# Allegro board XR808ST0_REF1_SIMPLE_V1_0-20191017.brd
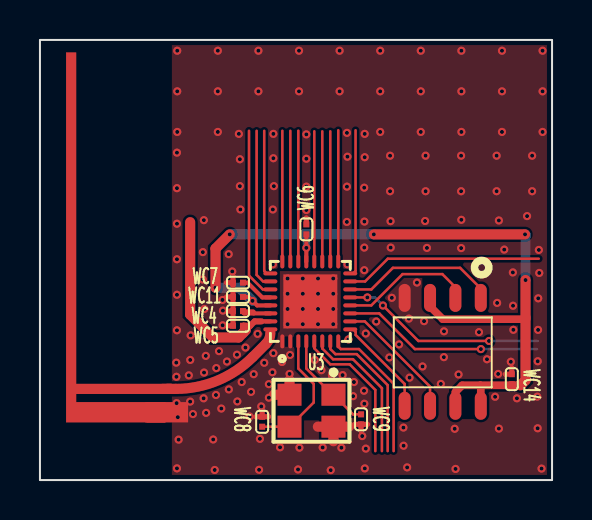
[diagram p0: board, top side]
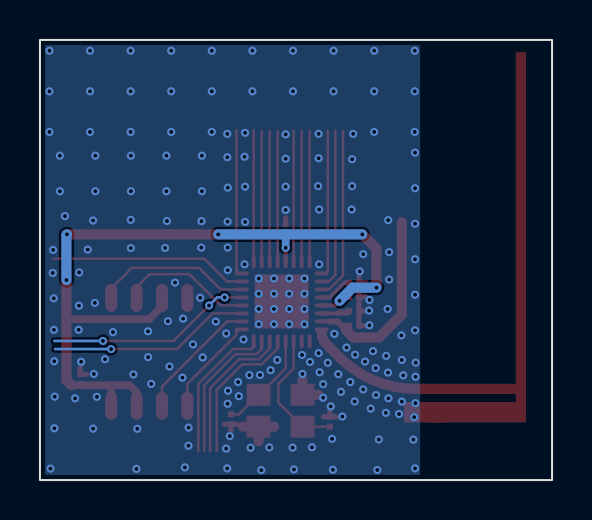
[diagram p1: board, bottom side, seen from below]

Outline 25.63 x 22.02 mm; copper layers: TOP, BOTTOM. Coordinates in mm from the lower left corner of the outline.
Outline path: rectangle 0,0 25.63,22.02

## Placement (name value [footprint] x y rotation side)
JW1  ANT-F  [ANT2B18_54X5_30]  6.35 4.56 90 top
U2  XR808ST  [QFN32P0_4B4_00X4_00H0_75]  13.53 8.94 90 top
U3  40MHz-E3SB40MHz  [CRY-TSX3225]  13.59 3.47 270 top
U4  SPI_NOR_16Mb  [SOP8_150MIL]  20.16 6.39 270 top
WC4  1uF  [C0201]  9.91 8.46 180 top
WC5  1uF  [C0201]  9.91 7.72 180 top
WC6  NC-104  [C0201]  13.34 12.55 90 top
WC7  1uF  [C0201]  9.91 9.88 0 top
WC8  10pF-NC  [C0201]  11.12 2.92 270 top
WC9  10pF-NC  [C0201]  16.07 3.04 270 top
WC11  1uF  [C0201]  9.91 9.16 180 top
WC14  NC-104  [C0201]  23.62 5.05 270 top

## Library data of the parts
JW1 = ANT-F_1
U2 = XR808ST0
U3 = Crystal4Pin_0
U4 = SPI-NOR-SO8
WC4-WC7 WC9 WC11 = CAPACITOR
WC8 WC14 = CAPACITOR_0

## Footprints (pads in the part's own frame, mm; a bottom-side part is the same pattern mirrored in y, then rotated)
ANT2B18_54X5_30
  rect 1.016x1.016 smd: 1(-1.168,0.577)
  rect 0.508x0.508 smd: 2(0,0)
C0201
  rect 0.3x0.3 smd: 1(-0.25,0) 2(0.25,0)
CRY-TSX3225
  rect 1.1x1.2 smd: 1(-0.8,1.1) 2(-0.8,-1.1) 3(0.8,-1.1) 4(0.8,1.1)
QFN32P0_4B4_00X4_00H0_75
  oval 0.7x0.2 smd: 1(-2,1.4) 2(-2,1) 3(-2,0.6) 4(-2,0.2) 5(-2,-0.2) 6(-2,-0.6) 7(-2,-1) 8(-2,-1.4) 17(2,-1.4) 18(2,-1) 19(2,-0.6) 20(2,-0.2) 21(2,0.2) 22(2,0.6) 23(2,1) 24(2,1.4)
  oval 0.2x0.7 smd: 9(-1.4,-2) 10(-1,-2) 11(-0.6,-2) 12(-0.2,-2) 13(0.2,-2) 14(0.6,-2) 15(1,-2) 16(1.4,-2) 25(1.4,2) 26(1,2) 27(0.6,2) 28(0.2,2) 29(-0.2,2) 30(-0.6,2) 31(-1,2) 32(-1.4,2)
  rect 2.7x2.7 smd: 33(0,0)
SOP8_150MIL
  oval 1.4x0.6 smd: 1(-2.725,1.905) 2(-2.725,0.635) 3(-2.725,-0.635) 4(-2.725,-1.905) 5(2.675,-1.905) 6(2.675,-0.635) 7(2.675,0.635) 8(2.675,1.905)

## Nets
GND: JW1.1(A) U2.1(GND1) U2.2(GND2) U2.33(EPAD) U3.2 U3.4(5) U4.4(VSS) WC4.2 WC5.2 WC6.2 WC7.1 WC8.1 WC9.2 WC11.2 WC14.1
VCC-BAT: U2.31(VBAT) WC5.1
VDD-ANA: U2.30(VDD_ANA) WC4.1
VDD-EXT: U2.21(VDD_IO) U2.29(VDD_EXT) U4.3(WP#) U4.7(HOLD#) U4.8(VCC) WC6.1 WC11.1 WC14.2
ANT: JW1.2(G) U2.32(ANT)
CHIP-PWD: U2.27(CHIP_PWD)
HXTAL1: U2.4(HXTAL1) U3.1 WC9.1
HXTAL2: U2.3(HXTAL2) U3.3 WC8.2
PA0: U2.7(PA00/TWI1_SCL/EINTA0)
PA1: U2.8(PA01/TWI1_SDA/EINTA1/PA18/TWI0_)
PA07: U2.20(PA07/UART1_TX/TWI0_SDA/EINTA7/P)
PA10: U2.23(PA10/ADC_CH0/PWM2/ECT2/EINTA10)
PA11: U2.22(PA11/ADC_CH1/PWM3/ECT3/EINTA11)
PA12: U2.26(LXTAL1/PA12/ADC_CH2/PWM4/ECT4/I)
PA13: U2.25(LXTAL2/PA13/ADC_CH3/PWM5/ECT5/U)
PA14: U2.24(PA14/ADC_CH4/PWM6/ECT6/UART1_RX)
PA19: U2.19(PA19/WUPIO5/UART2_RTS/TWI0_SCL/)
PA20: U2.18(PA20/WUPIO6/UART2_CTS/TWI0_SDA/)
PA21: U2.17(PA21/WUPIO7/UART2_RX/PWM2/ECT2/)
PA22: U2.16(PA22/WUPIO8/UART2_TX/PWM3/ECT3/)
PA23: U2.15(PA23/WUPIO9/TEST/EXT_DCDC_PUP/E)
PB2: U2.13(PB02/SWD_TMS/JTAG_TDO/PWM6/ECT6)
PB3: U2.11(PB03/SWD_TCK/JTAG_TDI/PWM7/ECT7)
SPI-CLK: U2.10(PB07/UART1_RTS/FLASH_CLK/EINTB7) U4.6(CLK)
SPI-CS: U2.14(PB06/UART1_CTS/FLASH_CS/EINTB6) U4.1(CS#)
SPI-MISO: U2.12(PB05/UART1_RX/FLASH_MISO/EINTB5) U4.2(MISO)
SPI-MOSI: U2.9(PB04/UART1_TX/FLASH_MOSI/EINTB4) U4.5(MOSI)
UART0-RX: U2.6(PB01/UART0_RX/JTAG_TCK/PWM5/ECT)
UART0-TX: U2.5(PB00/UART0_TX/JTAG_TMS/PWM4/ECT)
N17075984: U2.28(VDD_DIG) WC7.2

## Via types
v1: diameter 0.406, hole 0.203, TOP to BOTTOM, 210 vias

## Routing (per net, layer and track width the routed paths; a pad name or vN(x,y) marks a point on that pad's centre or on a via; arc(x,y) is an arc through that point)
GND: length 10.4
  TOP w0.254: 9.34,9.88 WC7.1 ; WC7.1 9.66,9.55 ; WC7.1 9.66,10.2 ; WC11.2 9.66,9.49 ; WC11.2 9.66,8.84 ; WC11.2 9.34,9.16 ; WC8.1 11.45,3.17 ; WC8.1 10.8,3.17 ; WC8.1 11.12,3.5 ; 9.66,8.05 WC5.2 9.34,7.72 ; WC4.2 9.66,8.78 ; WC4.2 9.66,8.13 ; WC4.2 9.34,8.46 ; 23.62,5.62 WC14.1 23.29,5.3 ; WC6.2 13.34,13.12 ; WC9.2 16.4,2.79 ; WC9.2 15.74,2.79 ; WC9.2 16.07,2.46
  TOP w0.508: U3.4 15.47,2.67 ; U3.4 13.91,2.67 ; U3.4 14.69,1.94 ; 11.71,4.27 U3.2 12.49,5
  vias: v1(6.82,5.87) v1(6.83,5.17) v1(6.84,3.85) v1(6.87,21.48) v1(6.87,19.45) v1(6.87,17.42) v1(6.86,16.38) v1(6.86,14.61) v1(6.86,12.83) v1(6.86,11.05) v1(6.86,9.27) v1(6.86,7.49) v1(6.9,3.15) v1(6.94,2.02) v1(6.86,0.58) v1(7.54,7.24) v1(7.52,6.01) v1(7.45,5.24) v1(7.52,3.92) v1(7.66,3.3) v1(8.2,13) v1(8.15,11.4) v1(8.15,10.03) v1(8.23,8.56) v1(8.21,5.38) v1(8.19,4.09) v1(8.3,6.21) v1(8.32,3.36) v1(8.67,2.03) v1(8.75,0.5) v1(8.83,5.6) v1(8.81,4.26) v1(8.9,21.48) v1(8.9,19.45) v1(8.9,17.42) v1(8.96,6.45) v1(9.14,9.01) v1(9.14,7.74) v1(9.08,3.58) v1(9.16,8.48) v1(9.45,11.3) v1(9.36,5.93) v1(9.45,4.53) v1(9.63,10.44) v1(9.86,6.27) v1(9.88,3.93) v1(9.96,17.32) v1(10.01,16.05) v1(10.01,14.71) v1(10.03,13.54) v1(10.1,4.9) v1(10.29,6.63) v1(10.5,3.18) v1(10.57,4.41) v1(10.7,5.3) v1(10.94,21.48) v1(10.94,19.45) v1(10.9,7.32) v1(11.01,2.06) v1(10.97,0.51) v1(11.08,3.68) v1(11.23,5.87) v1(11.46,4.8) v1(11.46,4.12) v1(11.64,5.39) v1(11.68,17.32) v1(11.68,16.1) v1(11.71,14.71) v1(11.66,13.54) v1(11.66,10.79) v1(11.68,6.35) v1(12.02,1.64) v1(12.12,5.91) v1(12.4,10.08) v1(12.4,9.32) v1(12.4,8.56) v1(12.4,7.8) v1(12.52,6.26) v1(12.49,5.31) v1(12.92,0.53) v1(12.97,21.48) v1(12.97,19.45) v1(12.99,1.62) v1(13.16,10.08) v1(13.16,9.32) v1(13.16,8.56) v1(13.16,7.8) v1(13.34,17.3) v1(13.34,16.08) v1(13.34,14.68) v1(13.34,13.51) v1(13.76,6.01) v1(13.92,10.08) v1(13.92,9.32) v1(13.92,8.56) v1(13.92,7.8) v1(14.09,5.5) v1(14.15,1.63) v1(14.62,5.26) v1(14.56,0.49) v1(14.68,10.08) v1(14.68,9.32) v1(14.68,8.56) v1(14.68,7.8) v1(15,21.48) v1(15,19.45) v1(15.15,5.25) v1(15.09,1.62) v1(15.37,17.37) v1(15.39,16.18) v1(15.37,14.68) v1(15.36,12.92) v1(15.39,10.79) v1(15.44,7.04) v1(15.72,4.9) v1(15.67,4.2) v1(16.13,2.2) v1(16.23,14.63) v1(16.24,12.93) v1(16.23,11.63) v1(16.23,10.5) v1(16.22,4.47) v1(16.24,3.82) v1(16.26,17.32) v1(16.26,16.15) v1(16.31,7.33) v1(16.31,1.57) v1(16.26,0.58) v1(16.83,7.93) v1(17.03,21.48) v1(17.03,19.45) v1(17.03,17.42) v1(17.53,16.23) v1(17.53,14.45) v1(17.55,12.95) v1(17.49,6.13) v1(17.56,11.63) v1(17.61,9.12) v1(17.98,6.79) v1(18.19,2.62) v1(18.2,1.72) v1(18.38,0.63) v1(18.47,8.08) v1(18.5,5.12) v1(18.87,9.88) v1(19.06,21.48) v1(19.06,19.45) v1(19.06,17.42) v1(19.23,7.95) v1(19.15,5.68) v1(19.3,16.23) v1(19.3,14.45) v1(19.28,12.96) v1(19.37,11.62) v1(20.07,4.81) v1(20.23,7.44) v1(20.22,6.15) v1(20.76,2.56) v1(20.8,0.56) v1(20.95,5.28) v1(21.1,21.48) v1(21.1,19.45) v1(21.1,17.42) v1(21.08,16.23) v1(21.08,14.45) v1(21.09,13.02) v1(21.08,11.61) v1(21.98,7.4) v1(22.38,6.05) v1(22.78,4.17) v1(22.86,16.23) v1(22.86,14.45) v1(22.89,8.86) v1(22.94,5.31) v1(22.97,12.99) v1(22.97,2.57) v1(23.13,21.48) v1(23.13,19.45) v1(23.13,17.42) v1(23.24,11.53) v1(23.57,5.92) v1(23.67,10.39) v1(23.68,8.72) v1(23.7,7.52) v1(23.88,4.09) v1(24.38,13.21) v1(24.64,16.23) v1(24.64,14.45) v1(24.94,9.09) v1(24.94,7.51) v1(24.92,5.94) v1(24.89,4.17) v1(24.91,2.59) v1(24.97,11.51) v1(24.99,10.36) v1(25.11,0.57) v1(25.16,21.48) v1(25.16,19.45) v1(25.16,17.42)
VCC-BAT: length 10.4
  TOP w0.203: 11.09,7.94 U2.31
  TOP w0.305: 11.09,7.94 10.74,7.94 10.52,7.72 ; 10.36,7.56 10.2,7.72 10.52,7.72 ; 10.36,7.56 10.52,7.72 ; 10.36,7.56 10.33,7.52 ; 10.16,7.36 WC5.1
  TOP w0.381: 10.33,7.52 10.31,7.51
  TOP w0.508: 7.52,12.9 7.52,8.28 8.66,7.13 9.94,7.13 10.31,7.51
VDD-ANA: length 1.4
  TOP w0.203: U2.30 10.71,8.34 10.66,8.39
  TOP w0.305: WC4.1 10.23,8.39 10.66,8.39
VDD-EXT: length 41.8
  TOP w0.203: WC6.1 13.34,11.62 v1(13.34,11.62) 13.34,11.58 13.33,11.58 U2.21 ; U2.29 10.87,8.74 v1(10.64,8.97) 10.44,9.16 WC11.1
  TOP w0.254: WC14.2 23.62,4.74
  TOP w0.305: 23.62,4.74 23.62,4.74
  TOP w0.381: 24.05,4.74 22.04,4.74 ; 22.04,4.74 21.14,4.74 20.8,4.4 U4.7 ; 22.04,4.74 22.07,4.72 U4.8 ; U4.3 19.53,8.69 20.17,8.05 24.25,8.05 24.31,8.11
  TOP w0.508: v1(8.79,9.63) 8.79,11.58 v1(9.5,12.29) ; v1(16.71,12.29) v1(24.28,12.29) ; 24.05,4.74 24.31,4.99 v1(24.31,10.01)
  BOTTOM w0.381: v1(13.34,11.62) 13.34,12.29
  BOTTOM w0.508: v1(24.31,10.01) 24.31,12.27 v1(24.28,12.29) ; v1(9.5,12.29) v1(16.71,12.29) ; v1(8.79,9.63) 9.98,9.63 v1(10.64,8.97)
ANT: length 6.4
  TOP w0.127: 11.53,7.35 U2.32
  TOP w0.508: JW1.2 6.8,4.56 arc(8.88,4.98) 10.65,6.16 11.31,6.81 arc(11.48,7.06) 11.53,7.35
CHIP-PWD: length 8.6
  TOP w0.127: U2.27 11.16,9.54 10.46,10.23 10.46,17.48
HXTAL1: length 5
  TOP w0.127: U2.4 13.33,5.58 14.65,4.27 U3.1 15.67,3.29 WC9.1
HXTAL2: length 6.5
  TOP w0.127: WC8.2 12.49,2.67 U3.3 13.7,3.88 13.7,4.81 12.93,5.58 U2.3
PA0: length 7.3
  TOP w0.127: 17.41,1.45 17.41,4.75 15.86,6.3 14.79,6.3 14.53,6.56 U2.7
PA1: length 7.2
  TOP w0.127: 17.7,1.45 17.7,4.82 15.97,6.55 15.06,6.55 14.93,6.68 U2.8
PA07: length 6.5
  TOP w0.127: U2.20 13.73,17.45
PA10: length 6.5
  TOP w0.127: U2.23 12.53,17.48
PA11: length 6.5
  TOP w0.127: U2.22 12.93,17.48
PA12: length 8
  TOP w0.127: 10.85,17.48 10.85,10.26 11.17,9.94 U2.26
PA13: length 7.4
  TOP w0.127: U2.25 11.35,10.34 11.23,10.47 11.23,17.48
PA14: length 6.5
  TOP w0.127: U2.24 12.13,17.48
PA19: length 6.5
  TOP w0.127: U2.19 14.13,17.45
PA20: length 6.5
  TOP w0.127: U2.18 14.53,17.45
PA21: length 6.6
  TOP w0.127: U2.17 14.93,17.5
PA22: length 7.4
  TOP w0.127: 15.8,17.5 15.8,10.47 15.67,10.34 U2.16
PA23: length 9.9
  TOP w0.127: 24.97,11.08 17.41,11.08 16.28,9.94 U2.15
PB2: length 10.3
  TOP w0.127: U2.13 v1(16.39,9.14) ; v1(22.48,6.96) 18.94,6.96 v1(17.17,8.73)
  BOTTOM w0.127: v1(17.17,8.73) 16.76,9.14 v1(16.39,9.14) ; v1(22.48,6.96) 24.92,6.96
PB3: length 10.1
  TOP w0.127: U2.11 16.98,8.34 18.77,6.55 v1(22.07,6.55)
  BOTTOM w0.127: v1(22.07,6.55) 24.88,6.55
SPI-CLK: length 6.3
  TOP w0.127: U2.10 16.26,7.94 19.53,4.67 U4.6
SPI-CS: length 7.9
  TOP w0.127: U2.14 16.59,9.54 17.67,10.62 21.03,10.62 22.07,9.58 U4.1
SPI-MISO: length 6.7
  TOP w0.127: U4.2 20.8,9.65 20.14,10.3 18.15,10.3 16.59,8.74 U2.12
SPI-MOSI: length 5
  TOP w0.127: U4.5 18.26,4.81 15.8,7.26 15.8,7.41 15.68,7.54 U2.9
UART0-RX: length 7.3
  TOP w0.127: U2.6 14.13,6.59 14.67,6.05 15.67,6.05 17.12,4.6 17.12,1.45
UART0-TX: length 7.3
  TOP w0.127: U2.5 13.73,6.59 14.53,5.79 15.5,5.79 16.79,4.51 16.79,1.45
N17075984: length 1.7
  TOP w0.203: WC7.2 10.39,9.88 11.13,9.14 U2.28

## Copper pours and planes (outline as drawn; the poured copper is in the pictures)
GND on TOP (solid shape): 7.42,2.88 5.33,2.88 5.33,3.9 7.42,3.9
GND on TOP (solid shape): 1.82,4.81 6.6,4.81 6.6,4.31 1.82,4.31 1.82,3.9 6.28,3.9 6.28,2.88 1.31,2.88 1.31,21.4 1.82,21.4
GND on TOP: 0.25,0.25 0.25,21.77 25.38,21.77 25.38,0.25 ; 4 cut-outs
GND on BOTTOM: 0.25,0.25 0.25,21.77 25.38,21.77 25.38,0.25

## Text on the board
NCLEGEND-1-2: FIGURE | SIZE | 8.0 | 15.75 | DRILL CHART: TOP to BOTTOM | ALL UNITS ARE IN MILS | PLATED | QTY | 203 | 26
